# Altium PCB DetectorBoard_V1p0.PcbDoc
Units mil, origin at the board's own origin, x right, y up, seen from the top; angles counter-clockwise.
Board outline 2165.35 x 3346.46 mil, 2 copper layers (Top Layer, Bottom Layer), stack 65.4 mil thick; 31 components, 15 nets, 90 pads, 13 vias.
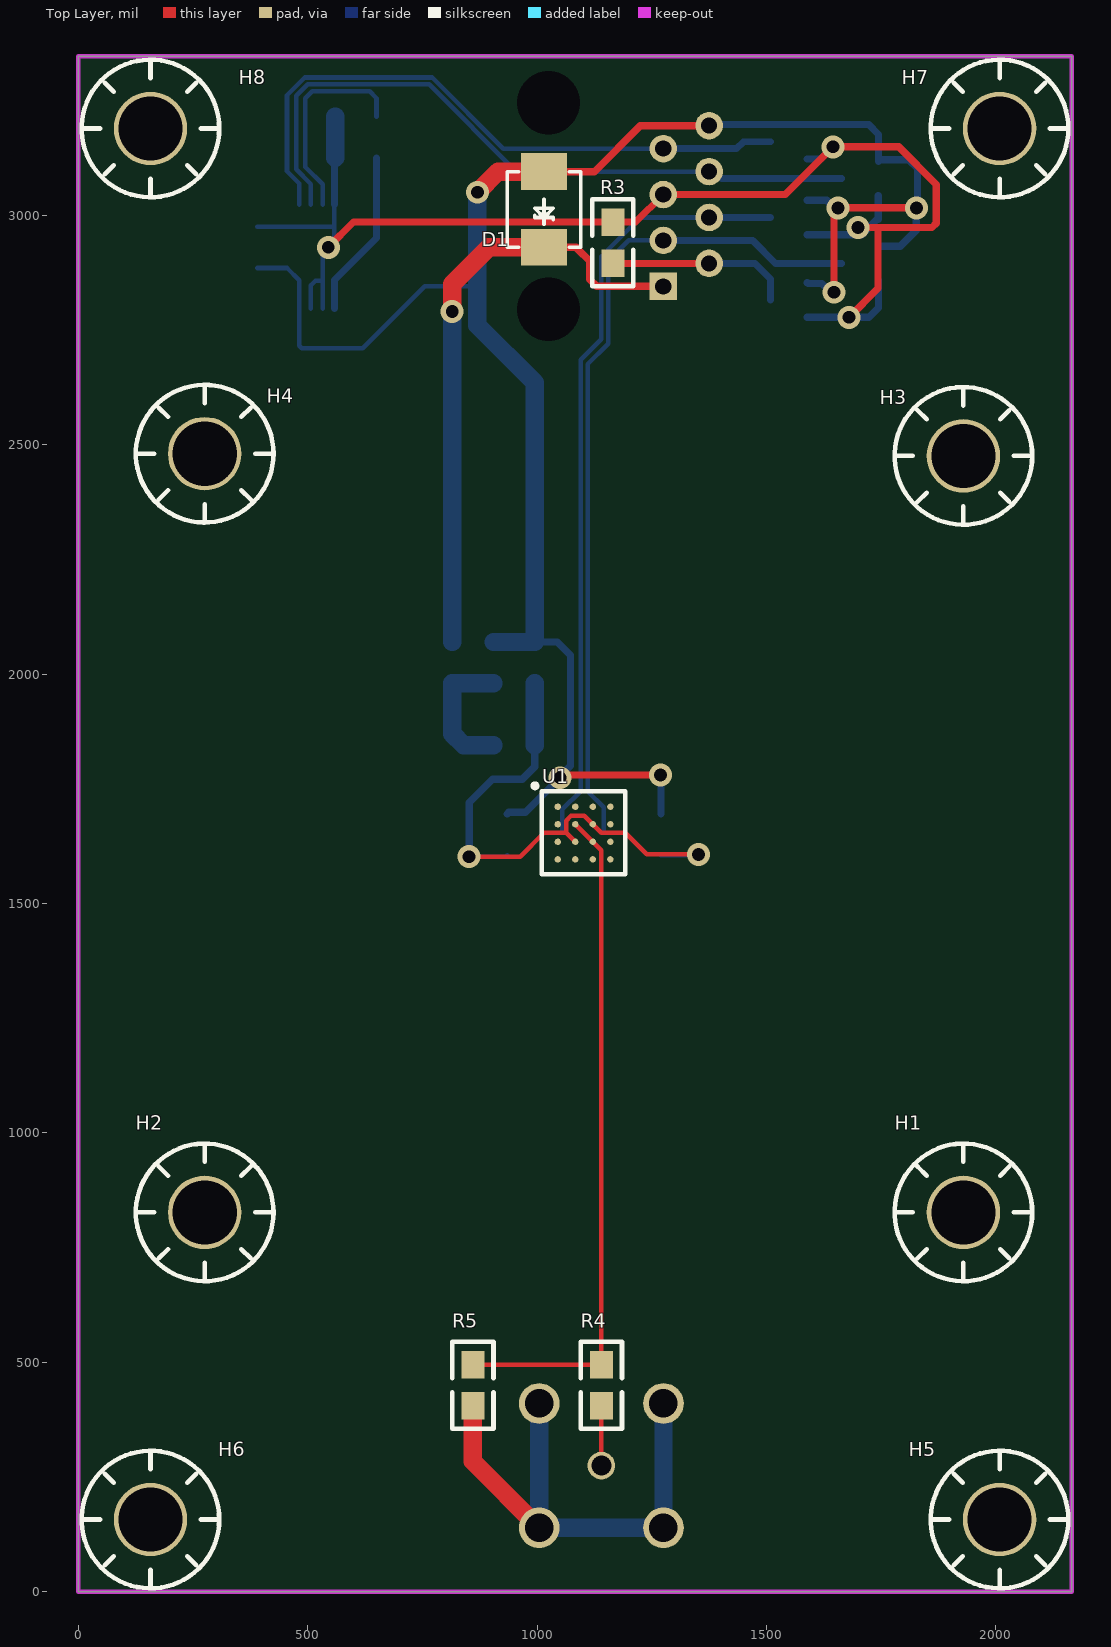
[diagram p0: Top Layer view]
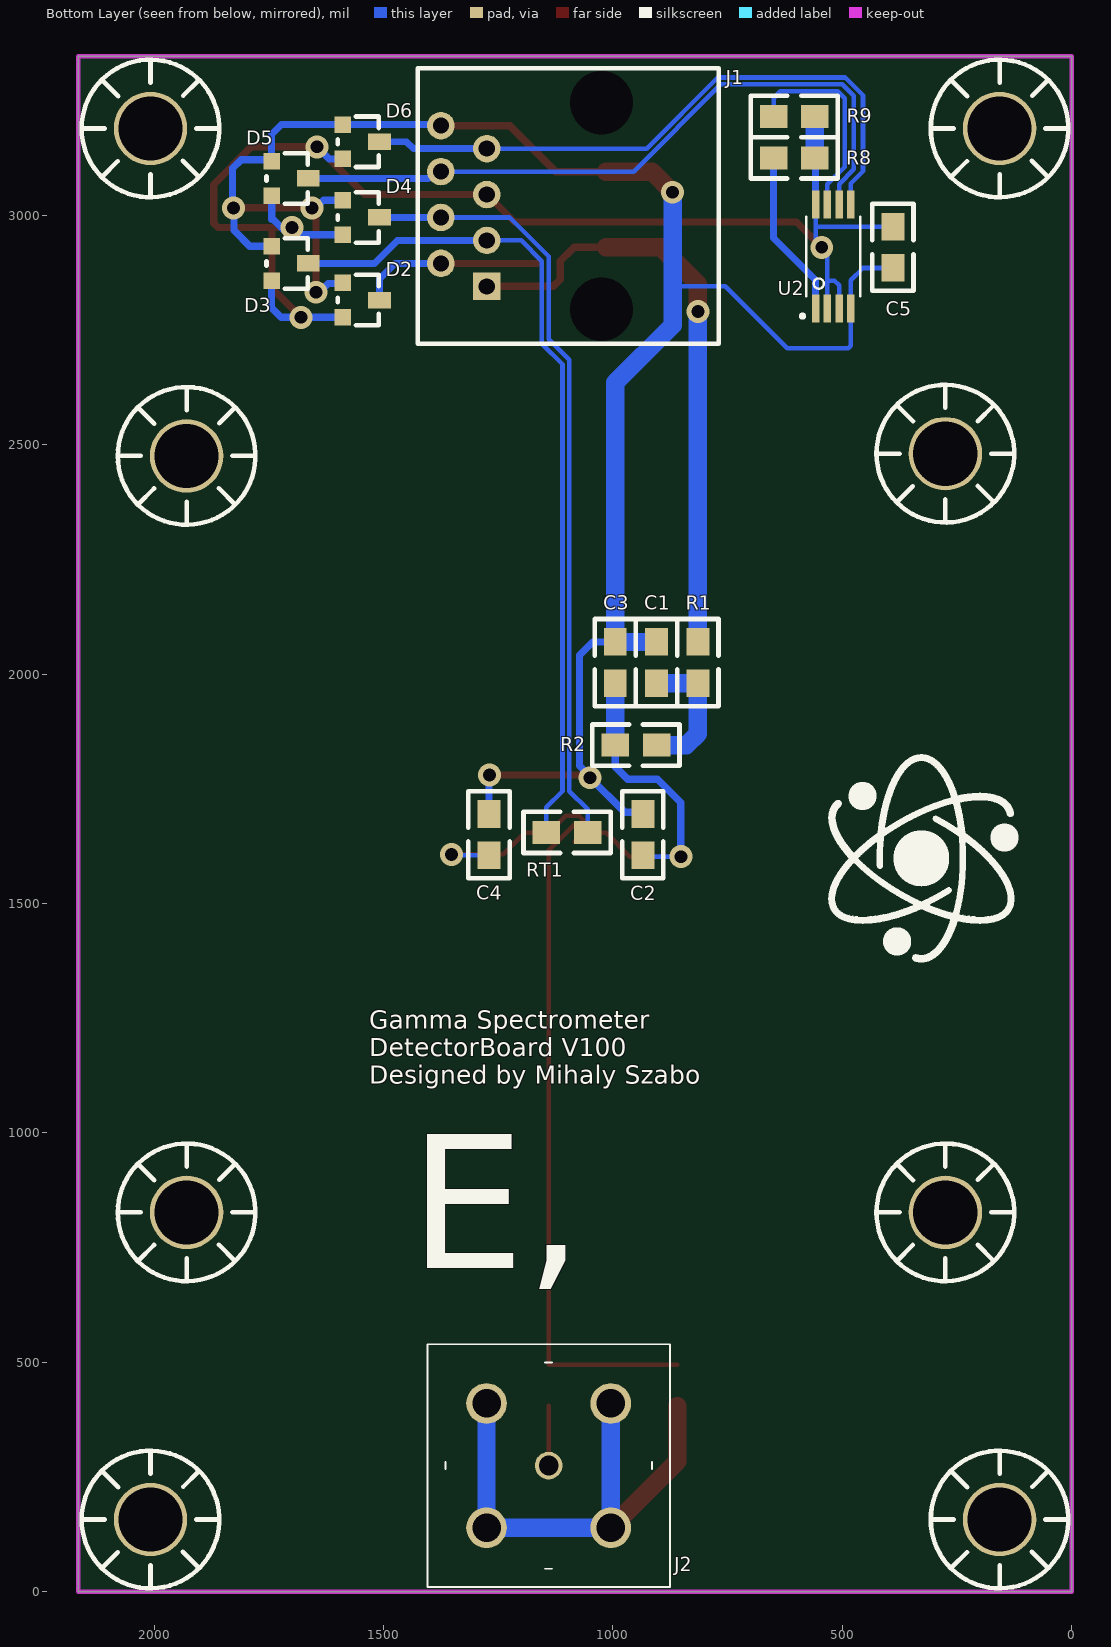
[diagram p1: Bottom Layer view, seen from below]
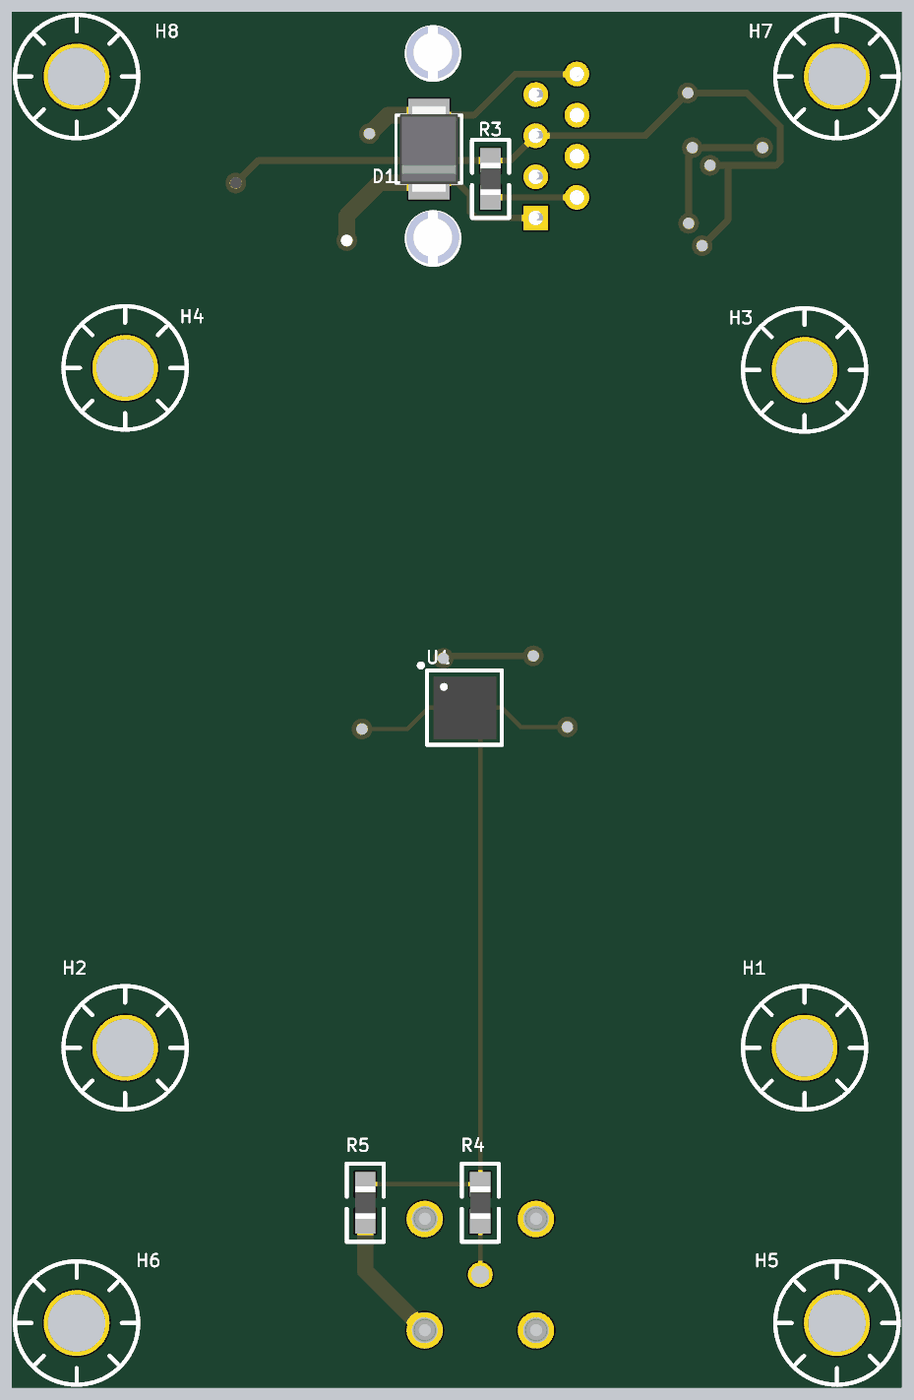
[diagram p2: 3D render of the assembled board from above, using the file's embedded part models]
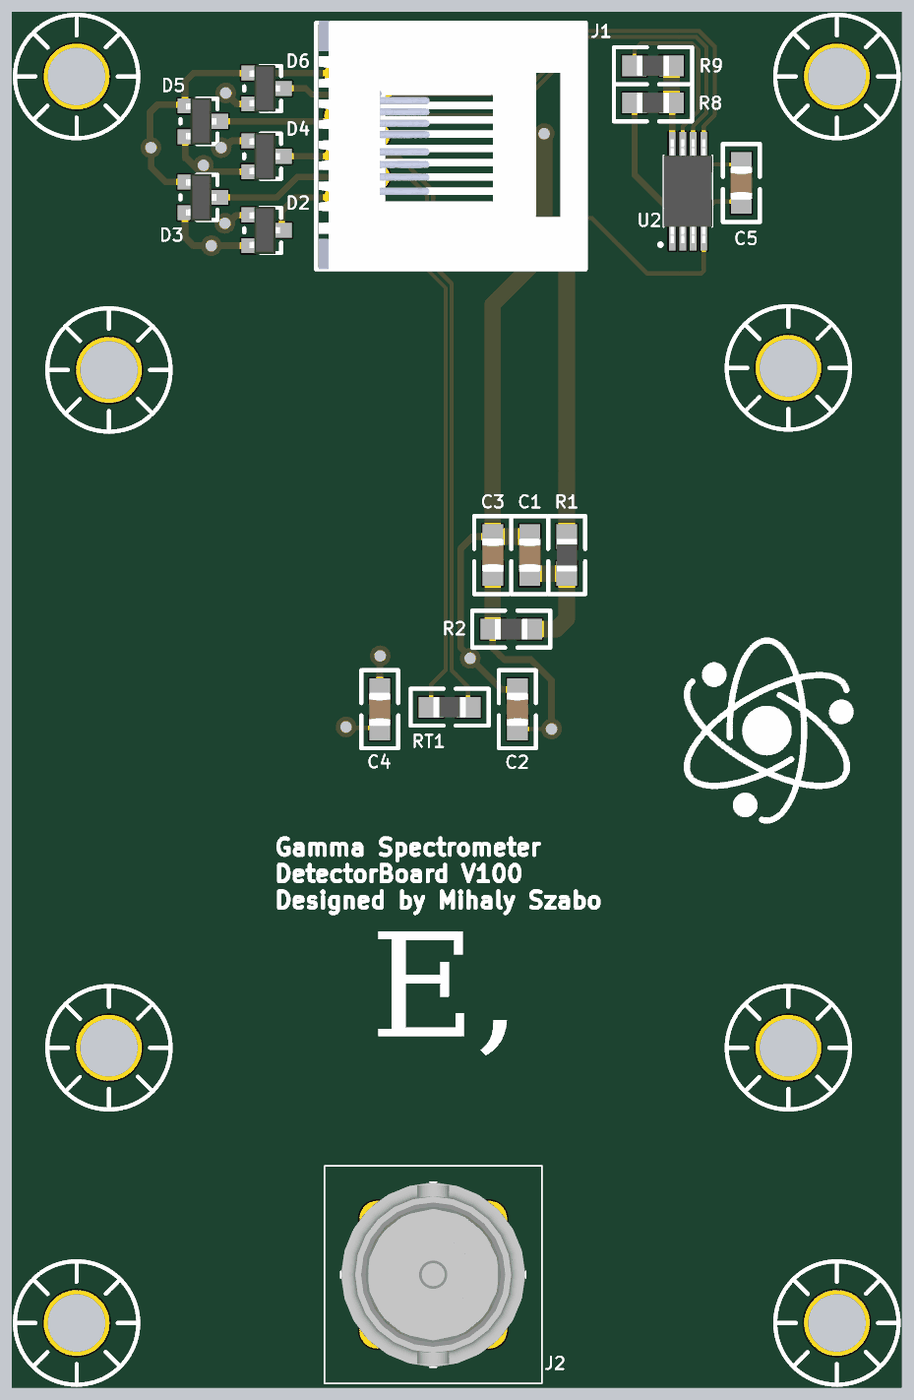
[diagram p3: 3D render of the assembled board from below, using the file's embedded part models]

## Layer stack, top to bottom
Top Solder: solder mask 0.8, Solder Resist, Dk 3.8
Top Layer: signal copper 1.4
Dielectric 1: dielectric 62.6, FR-4, Dk 4.8
Bottom Layer: signal copper 1.4
Bottom Solder: solder mask 0.8, Solder Resist, Dk 3.8

## Board outline
0,0 0,3346.46 2165.35,3346.46 2165.35,0

## Design rules (kind name [scope] priority, off if disabled: settings)
Clearance [All] p1: gap=10 ignorepadtopadclearanceinfootprint=FALSE except(0: Arc-Hole Track-Hole SMDPad-Hole THPad-Hole Via-Hole Fill-Hole Poly-Hole Region-Hole Text-Hole; 5: Arc-Arc Arc-Track Arc-SMDPad Track-Track Track-SMDPad SMDPad-SMDPad)
PolygonConnect [All] p1: connectstyle=Relief reliefconductorwidth=10 reliefentries=4 polygonreliefangle="90 Angle" airgapwidth=10
RoutingVias [All] p1: holewidth=28 width=50 viastyle="Through Hole" minholewidth=28 minwidth=50 maxholewidth=28 maxwidth=50
SolderMaskExpansion [All] p1: expansion=4 istentingtop=FALSE
Width [All] p1: maxlimit=40 minlimit=10 preferedwidth=16 minimp=50.000000 maximp=50.000000 favimp=50.000000
30 further rules are at their usual default settings.

## Classes and differential pairs
net class SINGLE50: NetR4_1

## Components (designator, comment, footprint, x,y, rotation, side; value= is the part's Value field where it differs from the comment)
C1 "100nF/50V" 0805_C 905,2025 r270 bottom
C2 "100nF/50V" 0805_C 935,1650 r270 bottom
C3 "100nF/50V" 0805_C 995,2025 r270 bottom
C4 "100nF/50V" 0805_C 1270,1650 r270 bottom
C5 "100nF" 0805_C 390,2930 r270 bottom
D1 "SMBJ36A" "DO-214AA (SMB)" 1015,3095 r270 top
D2 "BAS70-04" SOT23 1555,2815 r270 bottom
D3 "BAS70-04" SOT23 1710,2895 r270 bottom
D4 "BAS70-04" SOT23 1555,2995 r270 bottom
D5 "BAS70-04" SOT23 1710,3080 r270 bottom
D6 "BAS70-04" SOT23 1555,3160 r270 bottom
H1 "HOLE" HOLE_140_160MIL 1929.13,831.77 r0 top
H2 "HOLE" HOLE_140_160MIL 275.59,831.77 r0 top
H3 "HOLE" HOLE_140_160MIL 1929.13,2480.32 r0 top
H4 "HOLE" HOLE_140_160MIL 275.59,2485.32 r0 top
H5 "HOLE" HOLE_140_160MIL 2007.87,162.48 r0 top
H6 "HOLE" HOLE_140_160MIL 157.48,162.48 r0 top
H7 "HOLE" HOLE_140_160MIL 2007.87,3193.98 r0 top
H8 "HOLE" HOLE_140_160MIL 157.48,3193.98 r0 top
J1 "RJ45" RJ45_180DEG_KEYSTONE949 1150,3003 r180 bottom
J2 "BNC_5413969-2" 54139692 1140,275 r180 bottom
R1 "50" 0805 815,2025 r90 bottom
R2 "50" 0805 950,1845 r180 bottom
R3 "10k" 0805 1165,2940 r270 top
R4 "-" 0805 1140,450 r270 top
R5 "-" 0805 860,450 r90 top
R8 "-" 0805 605,3125 r180 bottom
R9 "-" 0805 605,3215 r0 bottom
RT1 "NTC" 0805 1100,1655 r0 bottom
U1 "AFBR-S4N44C013" BGA16C97P4X4_388X388X60 1102.36,1653.54 r0 top
U2 "M24C02-FDW6TP" TSSOP8 520,2910 r90 bottom

## Footprints (in the part's own frame and the unit in brackets; to place one, negate y for a bottom-side part, rotate by r counter-clockwise, add the part's x,y. Pads: shape width x height; smd on the part's side, far side on the other; paste and mask are expansions set on the pad)
0805 [mil]
  rect 60x50 smd: 1(-45,0) 2(45,0)
  silkscreen extent -95,-45 95,45, body extent -39,-25 39,25, height 24
0805_C [mil]
  rect 60x50 smd: 1(-45,0) 2(45,0)
  silkscreen extent -95,-45 95,45, body extent -41,-27 41,27, height 30
54139692 [mm]
  round 1.53 hole 1.1: 1(0,0)
  round 2.25 hole 1.58: MH1(-3.44,-3.44) MH2(3.44,-3.44) MH3(3.44,3.44) MH4(-3.44,3.44)
  silkscreen extent -6.72,-6.72 6.72,6.72, body extent -5.68,-5.68 5.68,5.68, height 20.69
BGA16C97P4X4_388X388X60 [mm] "BGA, 16-Leads, Body 3,88x3,88mmx0,60mm, Pitch 0,97mm"
  round 0.35 smd: A1(-1.455,1.455) A2(-0.485,1.455) A3(0.485,1.455) A4(1.455,1.455) B1(-1.455,0.485) B2(-0.485,0.485) B3(0.485,0.485) B4(1.455,0.485) C1(-1.455,-0.485) C2(-0.485,-0.485) C3(0.485,-0.485) C4(1.455,-0.485) D1(-1.455,-1.455) D2(-0.485,-1.455) D3(0.485,-1.455) D4(1.455,-1.455)
  silkscreen extent -2.84,-2.29 2.29,2.74, body extent -1.94,-1.94 1.94,1.94, height 0.6
"DO-214AA (SMB)" [mil] "SMB"
  rect 80x100 smd: A(0,0) K(165,0)
  silkscreen extent 0,-80 165,80, body extent -24,-71 189,71, height 92
HOLE_140_160MIL [mil]
  round 160 hole 140 unplated: 1(0,-5)
  silkscreen extent -150,-155 150,145
RJ45_180DEG_KEYSTONE949 [mil]
  rect 60x60 hole 35: 1(-125,-158)
  round 60 hole 35: 2(-225,-108) 3(-125,-58) 4(-225,-8) 5(-125,42) 6(-225,92) 7(-125,142) 8(-225,192)
  round 60 hole 137.8 unplated: 9(125,-208) 10(125,242)
  silkscreen extent -275,-283 381,317, body extent -268,-283 382,322, height 638
SOT23 [mil]
  rect 36x36 smd: 1(-37.5,-34) 2(37.5,-34)
  rect 36x50 smd: 3(0,46)
  silkscreen extent -55,-45 55,45, body extent -57,-42 57,52, height 44
TSSOP8 [mm]
  rect 1.56x0.41 smd: 1(-2.88,0.975) 2(-2.88,0.325) 3(-2.88,-0.325) 4(-2.88,-0.975) 5(2.88,-0.975) 6(2.88,-0.325) 7(2.88,0.325) 8(2.88,0.975)
  silkscreen extent -3.4,-1.5 2.2,1.8, body extent -3.2,-1.5 3.2,1.5, height 1.2

## Part data
C1 C2 C3 C4 C5: library part CAPACITOR
D1: library part DIODE_TVS
J1: "90 deg RJ45 connector, without transformer / 180 deg RJ45 connector without transformer"
R1 R2 R3 R4 R5 R8 R9: library part RESISTOR, Parameter 1=10k
U2: "EEPROM Memory IC 2Kb (256 x 8) I2C 400kHz 900ns 8-TSSOP", Package="TSSOP-8 STMicroelectronics", Digi-Key_Part_Number=497-15746-1-ND, MF=STMicroelectronics, MP=M24C02-FDW6TP, SnapEDA_Link=https://www.snapeda.com/parts/M24C02-FDW6TP/STMicroelectronics/view-part/1102461/?ref=snap

## Via types
v1: diameter 50, hole 28, Top Layer to Bottom Layer, tented both sides, 13 vias

## Nets (pads, with @x,y where several pads share a name; then routed paths per layer and width w, separated by ;. In a path a pad name is that pad's centre, name@x,y a point inside that pad or via, vN(x,y) a via of type N, cw(c..) or ccw(c..) an arc to the next point about the centre after c; other vN are vias at no path point)
3.3V: C5.1 D2.2 D3.2 D4.2 D5.2 D6.2 J1.5 R3.1 R8.2 R9.1 U2.2 U2.3 U2.8 | length 3134.2
  Top Layer w15: R3.1 1215,2985 J1.5
  Top Layer w16: v1(545,2930) 600,2985 R3.1 ; J1.5 1541,3045 v1(1645,3149) 1788,3149 1870,3067 1870,2982.37 1860.63,2973 1743,2973 ; v1(1680,2777.5) 1743,2840.5 1743,2973 ; v1(1699.19,2973) 1743,2973
  Bottom Layer w10: C5.1 558.39,2975 ; U2.3 507.2,2847.2 517.2,2857.2 532.8,2857.2 ; U2.2 532.8,2857.2 ; U2.8 558.39,2975 ; 532.8,2857.2 532.8,2917.8 v1(545,2930) 558.39,2943.39 558.39,2975
  Bottom Layer w15: U2.8 558.39,3123.39 R8.2
  Bottom Layer w16: D2.2 v1(1680,2777.5) 1723.5,2777.5 1744,2798 D3.2 ; D4.2 v1@1699.19,2957.5 ; D6.2 1618.5,3122.5 v1(1645,3149) ; v1(1699.19,2973) v1@1699.19,2957.5 ; D5.2 1743.5,3042 1743.5,2991.5 1743,2991 1740.7,2991 1707.2,2957.5 v1@1699.19,2957.5
  Bottom Layer w40: R8.2 R9.1
+V_DET: D1.K J1.1 R1.2 | length 1331.8
  Top Layer w16: D1.K 1085,2930 1089.99,2925.01 1115,2900 1115,2860 1130,2845 J1.1
  Top Layer w40: v1(815,2790) 815,2850 895,2930 D1.K
  Bottom Layer w40: R1.2 v1(815,2790)
A_GND: J2.MH1 J2.MH2 J2.MH3 J2.MH4 R5.1 | length 1137.9
  Top Layer w40: R5.1 860,284.13 J2.MH2
  Bottom Layer w40: J2.MH3 J2.MH2 J2.MH1 J2.MH4
DET_CON: D2.3 J1.2 R3.2 | length 404.1
  Top Layer w15: R3.2 J1.2
  Bottom Layer w15: J1.2 1475,2895 1509,2861 D2.3
GND: C1.1 C2.1 C3.1 C4.1 C5.2 D1.A D2.1 D3.1 D4.1 D5.1 D6.1 J1.8 U2.4 | length 4462.4
  Top Layer w16: D1.A 1125,3095 1225,3195 J1.8 ; v1(1050,1774) 1056,1780 v1(1269,1780) ; v1(1647,2832) 1647,2997.8 1656,3006.8 v1(1656,3016) v1(1827,3016)
  Top Layer w40: v1(870,3050) 915,3095 D1.A
  Bottom Layer w10: C5.2 455,2885 481.61,2858.39 U2.4 481.61,2715.86 487.47,2710 620,2710 755,2845 870,2845
  Bottom Layer w16: C2.1 938.63,1698.63 974.63,1698.63 v1(1050,1774) 1050,1777.37 1073,1800.37 1073,2041 1044,2070 C3.1 ; v1(1269,1780) 1270,1779 C4.1 ; J1.8 1377.5,3197.5 D6.1 1722.5,3197.5 1744,3176 D5.1 1747.5,3121 1810,3121 1829,3102 v1@1829,3016 ; D2.1 1590.5,2851 1620.63,2851 1639.63,2832 v1(1647,2832) ; D4.1 1630.92,3032.5 1647.42,3016 v1(1656,3016) ; D3.1 1791.5,2932.5 1826,2967 1826,3015 v1(1827,3016)
  Bottom Layer w40: v1(870,3050) 870,2845 870,2760 995,2635 C3.1 C1.1
NetC1_2: C1.2 R1.1 R2.2 | length 300.4
  Bottom Layer w40: R2.2 840,1845 815,1870 R1.1 C1.2
NetC2_2: C2.2 C3.2 C4.2 R2.1 U1.B3 U1.C2 | length 1257.3
  Top Layer w10: v1(852,1602) 963,1602 1015,1654 1063.72,1654 ; U1.C2 1063.72,1654 ; v1(1352,1607) 1239,1607 1192,1654 1140.09,1654 U1.B3 1103.09,1691 1074,1691 1063.72,1680.72 1063.72,1654
  Bottom Layer w10: v1(852,1602) 932,1602 C2.2 ; C4.2 1350,1605 v1(1352,1607)
  Bottom Layer w16: v1(852,1602) 852,1720 903,1771 968,1771 995,1798 R2.1
  Bottom Layer w40: R2.1 C3.2
NetD3_3: D3.3 J1.3 RT1.2 | length 1826.5
  Bottom Layer w10: RT1.2 1145,1710 1110,1745 1110,2675 1155,2720 1155,2900 1200,2945 J1.3
  Bottom Layer w15: J1.3 1470,2945 1520,2895 D3.3
NetD4_3: D4.3 J1.4 RT1.1 | length 1694.4
  Bottom Layer w10: RT1.1 1055,1705 1095,1745 1095,2685 1140,2730 1140,2910 1225,2995 J1.4
  Bottom Layer w15: J1.4 D4.3
NetJ2_1: J2.1 R4.2 | length 130
  Top Layer w10: J2.1 R4.2
NetR4_1: R4.1 R5.2 U1.B2 U1.C3 | length 1481.1
  Top Layer w10: R5.2 R4.1 1140,1615.91 U1.C3 U1.B2
NetR8_1: R8.1 U2.1 | length 366.3
  Bottom Layer w15: U2.1 558.39,2858.39 650,2950 R8.1
NetR9_2: R9.2 U2.7 | length 454.7
  Bottom Layer w10: U2.7 532.8,3067.2 495,3105 495,3255 510,3270 635,3270 650,3255 R9.2
SCL: D5.3 J1.6 U2.6 | length 1534.2
  Bottom Layer w10: U2.6 507.2,3067.8 475,3100 475,3260 500,3285 765,3285 955,3095 J1.6
  Bottom Layer w15: J1.6 1387.18,3095 1402.18,3080 D5.3
SDA: D6.3 J1.7 U2.5 | length 1389.3
  Bottom Layer w10: U2.5 481.61,3069.09 455,3095.71 455,3261.21 493.79,3300 771.21,3300 926.21,3145 J1.7
  Bottom Layer w15: J1.7 1435,3145 1450,3160 D6.3
pads on no net: H1.1 H2.1 H3.1 H4.1 H5.1 H6.1 H7.1 H8.1 J1.9 J1.10 U1.A1 U1.A2 U1.A3 U1.A4 U1.B1 U1.B4 U1.C1 U1.C4 U1.D1 U1.D2 U1.D3 U1.D4

## Keep-outs
Keep-Out Layer:
  the board outline again, w10

## Silkscreen, mask and mechanical layers (free items; w line width, h text height)
Bottom Overlay:
  drawing of 5 lines, arcs and shapes, not listed
  text "Gamma Spectrometer / DetectorBoard V100 / Designed by Mihaly Szabo" at 1531,1107 h40
  text "E," at 1443.52,609 h500